# Altium PCB AirLP.PcbDoc
Units mm, origin at the board's own origin, x right, y up, seen from the top; angles counter-clockwise.
Board outline 81 x 61 mm, 2 copper layers (Top Layer, Bottom Layer), stack 1.597 mm thick; 142 components, 85 nets, 433 pads, 108 vias.
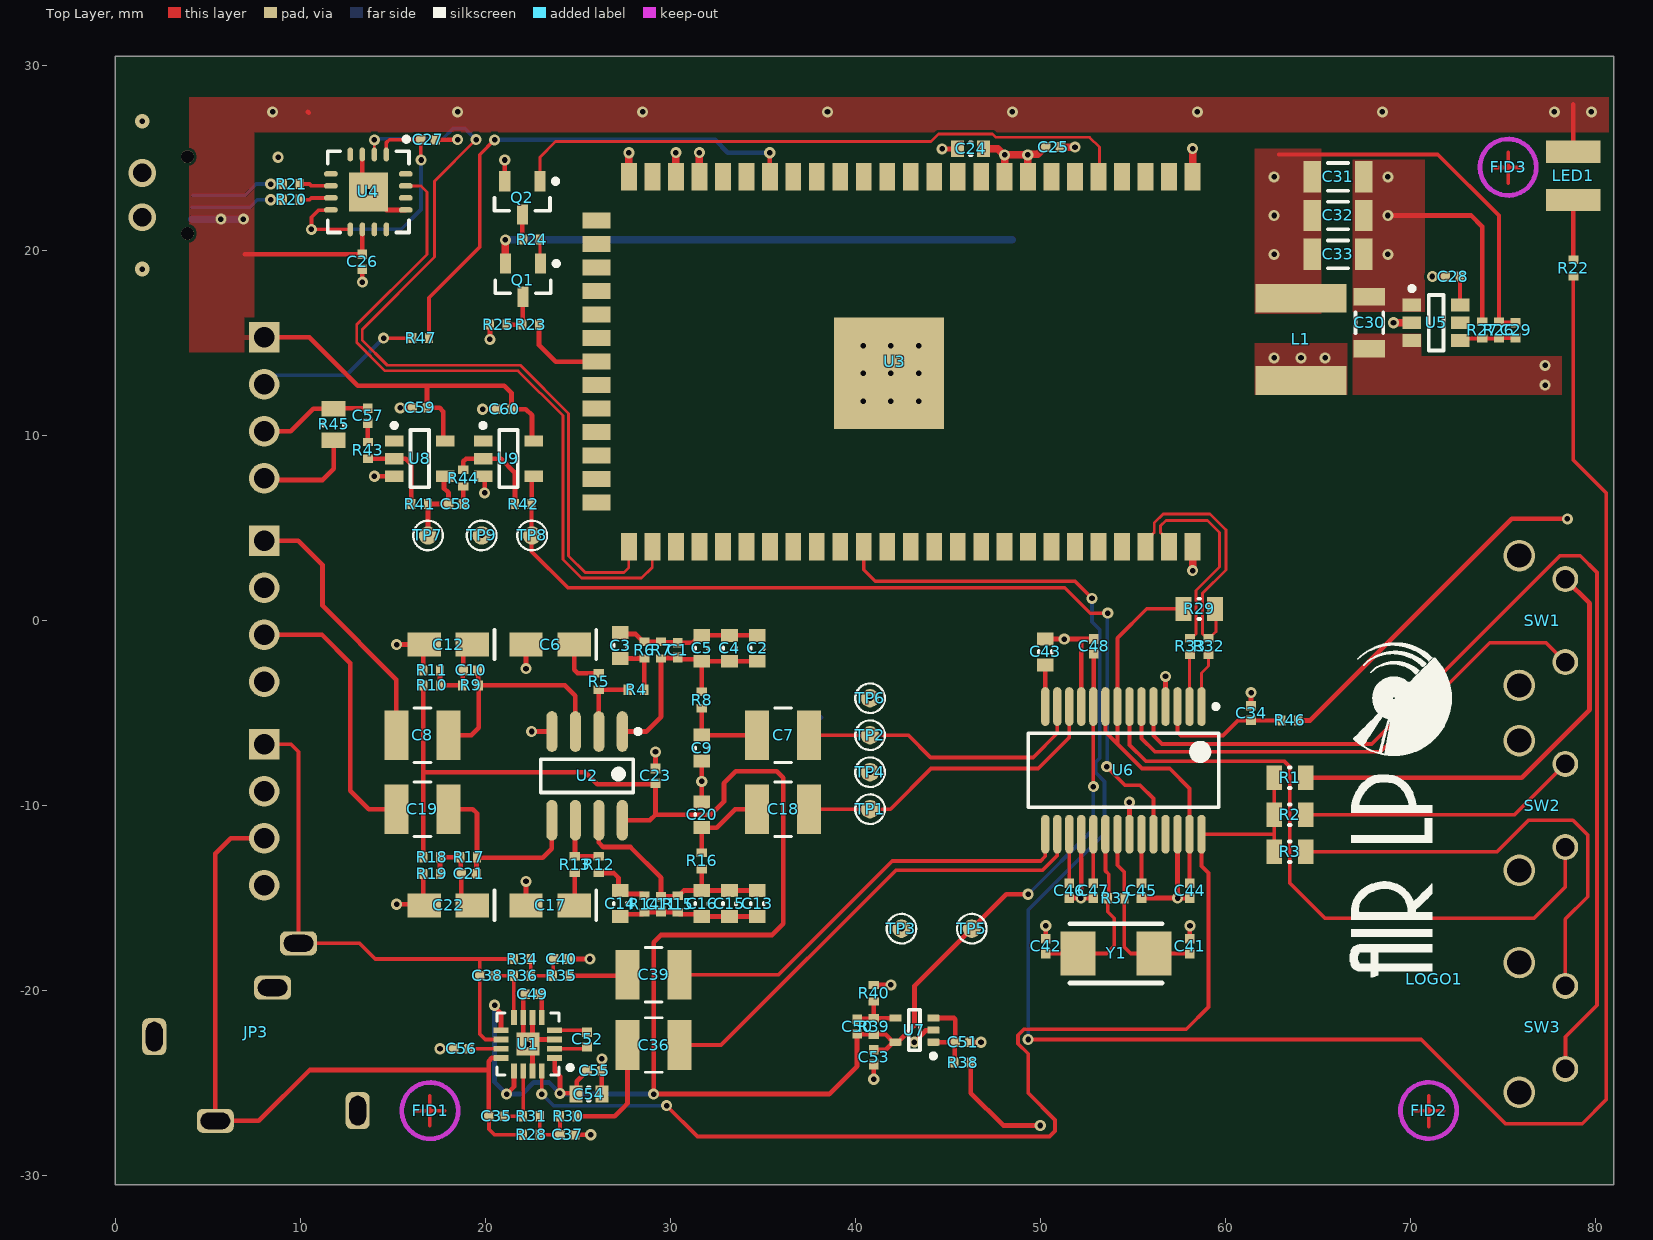
[diagram p0: Top Layer view]
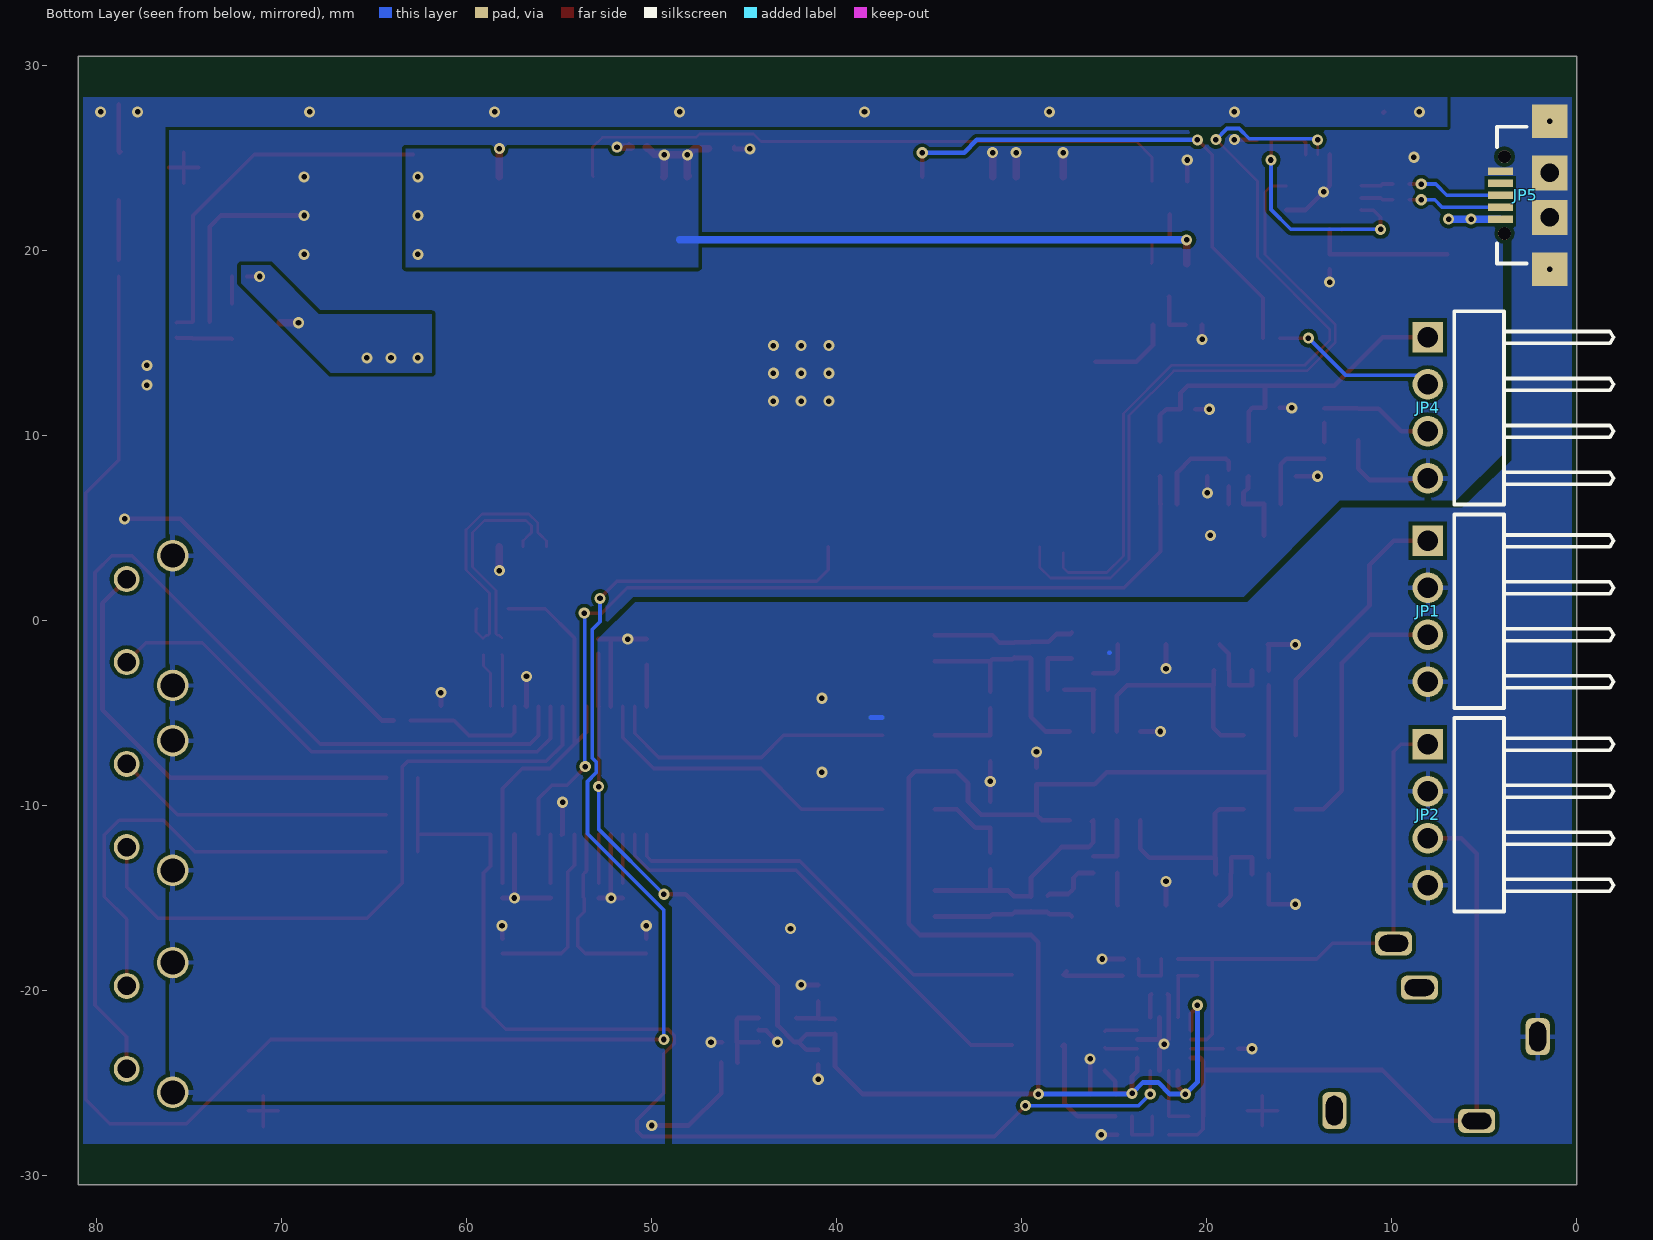
[diagram p1: Bottom Layer view, seen from below]
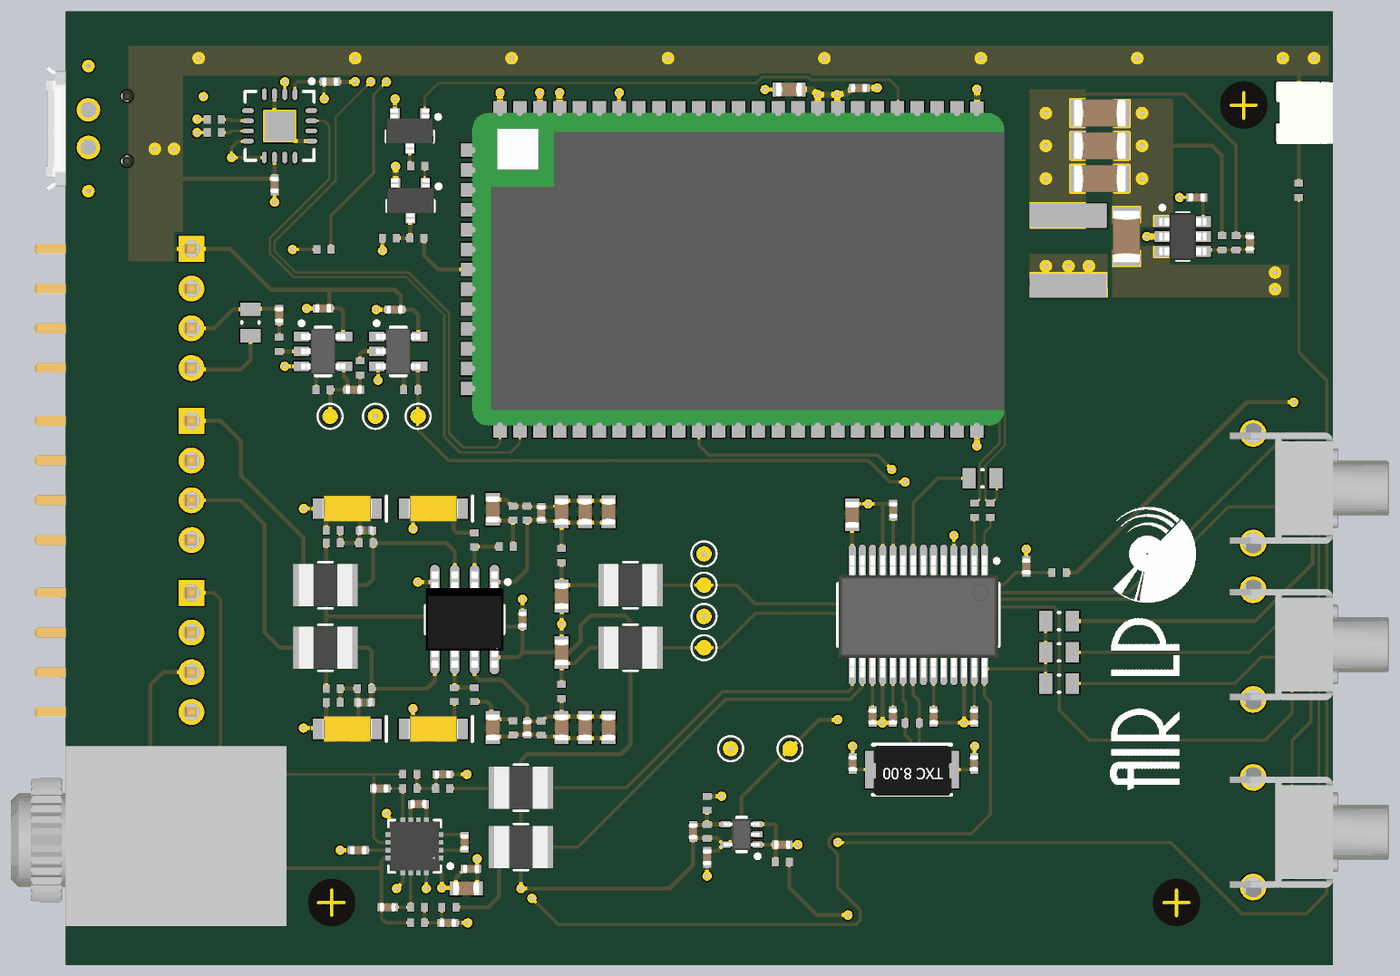
[diagram p2: 3D render of the assembled board from above, using the file's embedded part models]
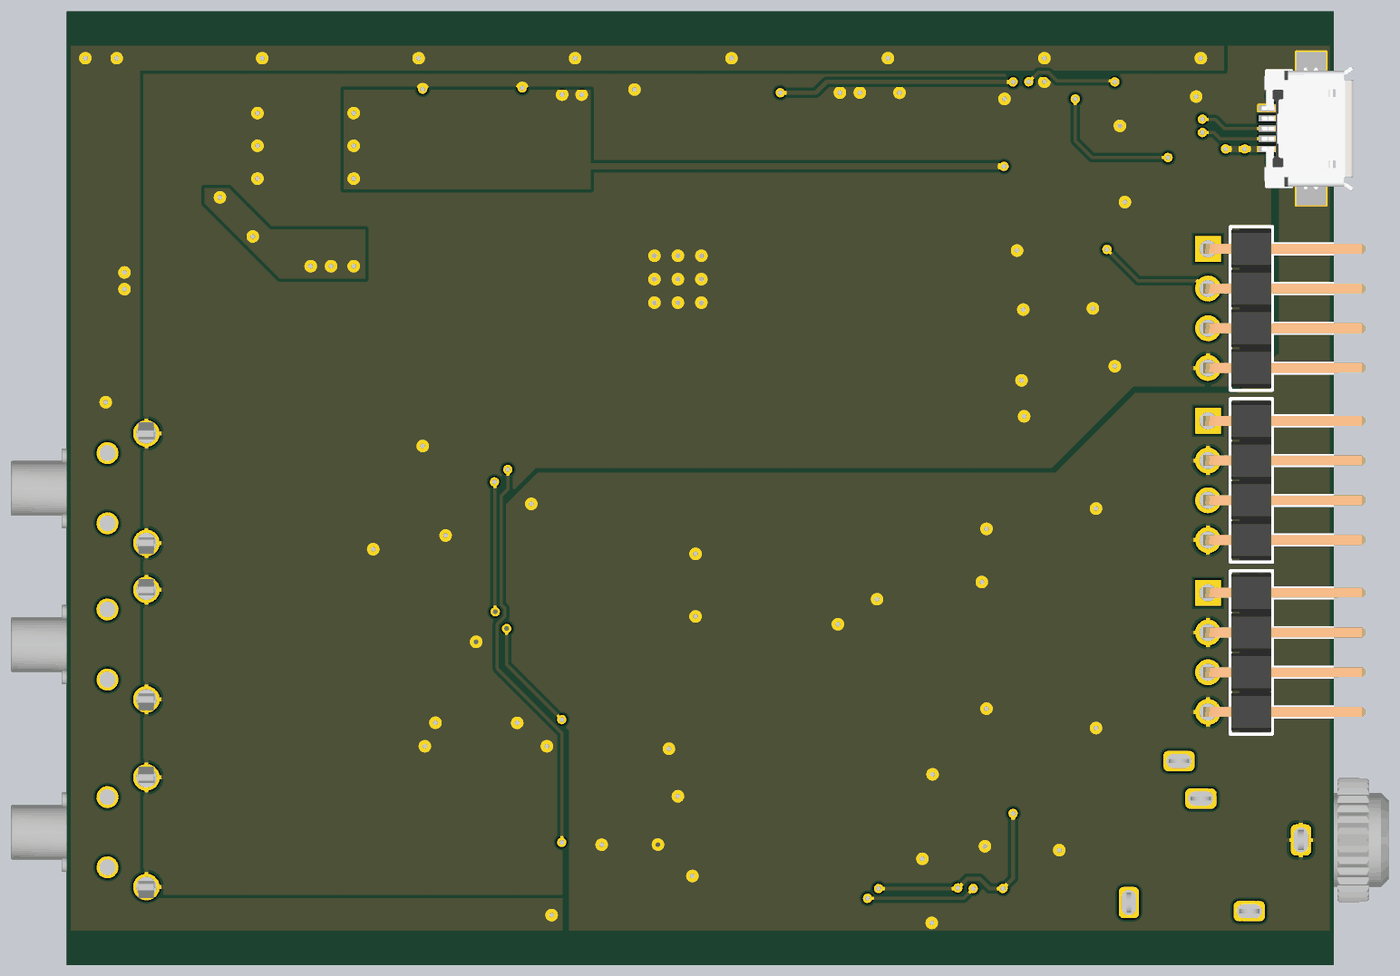
[diagram p3: 3D render of the assembled board from below, using the file's embedded part models]

## Layer stack, top to bottom
Top Solder: solder mask 0.0102, Solder Resist, Dk 3.5
Top Layer: signal copper 0.0356
Dielectric 1: dielectric 1.526, FR-4, Dk 4.8
Bottom Layer: signal copper 0.0356
Bottom Solder: solder mask 0.0102, Solder Resist, Dk 3.5

## Board outline
0,-30.5 81,-30.5 81,30.5 0,30.5

## Design rules (kind name [scope] priority, off if disabled: settings)
BoardOutlineClearance BoardOutlineClearance-BL [OnLayer('Bottom Layer')] p1: gap=0.254 ignorepadtopadclearanceinfootprint=FALSE except(0: Arc-SplitContinuation Track-SplitContinuation SMDPad-SplitContinuation THPad-SplitContinuation Via-SplitContinuation Fill-SplitContinuation Poly-SplitContinuation Region-SplitContinuation Text-SplitContinuation)
BoardOutlineClearance BoardOutlineClearance-TL [OnLayer('Top Layer')] p2: gap=0.254 ignorepadtopadclearanceinfootprint=FALSE except(0: Arc-SplitContinuation Track-SplitContinuation SMDPad-SplitContinuation THPad-SplitContinuation Via-SplitContinuation Fill-SplitContinuation Poly-SplitContinuation Region-SplitContinuation Text-SplitContinuation)
Clearance Clearance-BL [OnLayer('Bottom Layer')] p1: gap=0.2 ignorepadtopadclearanceinfootprint=FALSE
Clearance [All] p2: gap=0.15 ignorepadtopadclearanceinfootprint=FALSE
DiffPairsRouting DiffPairsRouting-D0 [InDifferentialPair('D0')] p1: maxlimit=0.205 minlimit=0.2 mostfreqgap=0.2 toplayer_minwidth=0.15 toplayer_maxwidth=0.15 toplayer_prefwidth=0.15 bottomlayer_minwidth=0.15 bottomlayer_maxwidth=0.15 bottomlayer_prefwidth=0.15 maxuncoupledlength=12.7
DiffPairsRouting DiffPairsRouting-D1 [InDifferentialPair('D1')] p2: maxlimit=0.205 minlimit=0.2 mostfreqgap=0.2 toplayer_minwidth=0.15 toplayer_maxwidth=0.15 toplayer_prefwidth=0.15 bottomlayer_minwidth=0.15 bottomlayer_maxwidth=0.15 bottomlayer_prefwidth=0.15 maxuncoupledlength=12.7
Height [All] p1: minheight=0 maxheight=10.15 prefheight=10
HoleSize [All] p1: absolutevalues=TRUE maxlimit=3 minlimit=0.3 maxpercent=80.000 minpercent=20.000
MinimumSolderMaskSliver [All] p1: minsoldermaskwidth=0
PolygonConnect [All] p1: thpad.connectstyle=Relief thpad.reliefconductorwidth=0.254 thpad.reliefentries=4 thpad.polygonreliefangle="90 Angle" thpad.airgapwidth=0.254 smdpad.connectstyle=Direct smdpad.reliefconductorwidth=0.254 smdpad.reliefentries=4 smdpad.polygonreliefangle="90 Angle" smdpad.airgapwidth=0.254 via.connectstyle=Direct via.reliefconductorwidth=0.254 via.reliefentries=4 via.polygonreliefangle="90 Angle" via.airgapwidth=0.254
RoutingVias [All] p1: holewidth=0.3 width=0.6 viastyle="Through Hole" minholewidth=0.3 minwidth=0.6 maxholewidth=0.5 maxwidth=1
SilkToSilkClearance [All] p1: silktosilkclearance=0.15
SilkToSolderMaskClearance [InPadClass('All Pads') And OnLayer('Top Layer')] p1: minsilkscreentomaskgap=0.15 clearancetoexposedcopper=TRUE
SolderMaskExpansion [All] p1: expansion=0.102
Width [All] p1: maxlimit=2 minlimit=0.15 preferedwidth=0.254
24 further rules are at their usual default settings.

## Classes and differential pairs
component class U_SPDIF-RX: C57 C58 C59 C60 R41 R42 R43 R44 R45 TP7 TP8 TP9 U8 U9
component class U_OM-02P: C24 C25 C26 C27 C28 C29 C30 C31 C32 C33 JP5 L1 LED1 Q1 Q2 R20 R21 R22 R23 R24 R25 R26 R27 R47 U3 U4 U5
component class U_USBDAC: C34 C35 C36 C37 C38 C39 C40 C41 C42 C43 C44 C45 C46 C47 C48 C49 C50 C51 C52 C53 C54 C55 C56 R28 R29 R30 R31 R32 R33 R34 R35 R36 R37 R38 R39 R40 R46 TP5 TP6 U1 U6 U7 Y1
component class U_RIAA: C1 C2 C3 C4 C5 C6 C7 C8 C9 C10 C11 C12 C13 C14 C15 C16 C17 C18 C19 C20 C21 C22 C23 R4 R5 R6 R7 R8 R9 R10 R11 R12 R13 R14 R15 R16 R17 R18 R19 U2
component class AirLP: FID1 FID2 FID3 JP1 JP2 JP3 JP4 LOGO1 R1 R2 R3 SW1 SW2 SW3 TP1 TP2 TP3 TP4
differential pair D1: +D1_P -D1_N

## Components (designator, comment, footprint, x,y, rotation, side; value= is the part's Value field where it differs from the comment)
C1 "0402CG101J500NT" CAPC0402(1005)33_L 30.4,-1.6 r270 top value=100pF
C2 "CL10C332JB8NFNC" CAPC0603(1608)55_L 34.7,-1.5 r270 top value=3.3nF
C3 "CL10C332JB8NFNC" CAPC0603(1608)55_L 27.3,-1.35 r90 top value=3.3nF
C4 "CL10C332JB8NFNC" CAPC0603(1608)55_L 33.2,-1.5 r270 top value=3.3nF
C5 "CL10C332JB8NFNC" CAPC0603(1608)55_L 31.7,-1.5 r270 top value=3.3nF
C6 "TAJA476K006RNJ" CAPPM3216X180N 23.5,-1.3 r180 top value=47uF
C7 "1uF" CAP_ECPU_G2 36.1,-6.2 r0 top
C8 "1uF" CAP_ECPU_G2 16.6,-6.2 r0 top
C9 "CL10C332JB8NFNC" CAPC0603(1608)55_L 31.7,-6.9 r90 top value=3.3nF
C10 "CC0402JRNPO9BN330" CAPC0402(1005)33_L 19.2,-2.7 r180 top value=33pF
C11 "0402CG101J500NT" CAPC0402(1005)33_L 29.5,-15.333 r90 top value=100pF
C12 "TAJA476K006RNJ" CAPPM3216X180N 18,-1.3 r180 top value=47uF
C13 "CL10C332JB8NFNC" CAPC0603(1608)55_L 34.7,-15.3 r90 top value=3.3nF
C14 "CL10C332JB8NFNC" CAPC0603(1608)55_L 27.3,-15.3 r270 top value=3.3nF
C15 "CL10C332JB8NFNC" CAPC0603(1608)55_L 33.2,-15.3 r90 top value=3.3nF
C16 "CL10C332JB8NFNC" CAPC0603(1608)55_L 31.7,-15.3 r90 top value=3.3nF
C17 "TAJA476K006RNJ" CAPPM3216X180N 23.5,-15.4 r180 top value=47uF
C18 "1uF" CAP_ECPU_G2 36.1,-10.2 r0 top
C19 "1uF" CAP_ECPU_G2 16.6,-10.2 r0 top
C20 "CL10C332JB8NFNC" CAPC0603(1608)55_L 31.7,-10.5 r270 top value=3.3nF
C21 "CC0402JRNPO9BN330" CAPC0402(1005)33_L 19.1,-13.7 r180 top value=33pF
C22 "TAJA476K006RNJ" CAPPM3216X180N 18,-15.4 r180 top value=47uF
C23 "GRM155R61C105KA12D" CAPC0402(1005)33_L 29.2,-8.4 r270 top value=1uF
C24 "CL10A106MQ8NNNC" CAPC0603(1608)55_L 46.24,25.5 r0 top value=10uF
C25 "GRM155R61C105KA12D" CAPC0402(1005)33_L 50.7,25.6 r180 top value=1uF
C26 "GRM155R61C104KA88D" CAPC0402(1005)33_L 13.35,19.4 r270 top value=100nF
C27 "GRM155R61C104KA88D" CAPC0402(1005)33_L 16.9,26 r0 top value=100nF
C28 "GRM155R61C104KA88D" CAPC0402(1005)33_L 72.3,18.6 r180 top value=100nF
C29 "GRM1555C1H680JA01D" CAPC0402(1005)33_L 75.7,15.7 r90 top value=68pF
C30 "CC1206KKX5R7BB226" CAPC1206(3216)75_L 67.8,16.1 r270 top value=22uF
C31 "CC1206KKX5R7BB226" CAPC1206(3216)75_L 66.1,23.99 r180 top value=22uF
C32 "CC1206KKX5R7BB226" CAPC1206(3216)75_L 66.1,21.9 r180 top value=22uF
C33 "CC1206KKX5R7BB226" CAPC1206(3216)75_L 66.1,19.8 r180 top value=22uF
C34 "GRM155R61C105KA12D" CAPC0402(1005)33_L 61.4,-5 r270 top value=1uF
C35 "0402CG101J500NT" CAPC0402(1005)33_L 20.585,-26.8 r180 top value=100pF
C36 "1uF" CAP_ECPU_G2 29.1,-22.952 r180 top
C37 "GRM1555C1H471JA01D" CAPC0402(1005)33_L 24.435,-27.8 r180 top value=470pF
C38 "0402CG101J500NT" CAPC0402(1005)33_L 20.1,-19.2 r180 top value=100pF
C39 "1uF" CAP_ECPU_G2 29.1,-19.152 r180 top
C40 "GRM1555C1H471JA01D" CAPC0402(1005)33_L 24.1,-18.3 r180 top value=470pF
C41 "CC0402JRNPO9BN330" CAPC0402(1005)33_L 58.075,-17.6 r270 top value=33pF
C42 "CC0402JRNPO9BN330" CAPC0402(1005)33_L 50.3,-17.6 r270 top value=33pF
C43 "CL10A106MQ8NNNC" CAPC0603(1608)55_L 50.275,-1.7 r270 top value=10uF
C44 "GRM155R61C105KA12D" CAPC0402(1005)33_L 58.075,-14.6 r90 top value=1uF
C45 "GRM155R61C105KA12D" CAPC0402(1005)33_L 55.475,-14.6 r90 top value=1uF
C46 "GRM155R61C105KA12D" CAPC0402(1005)33_L 51.575,-14.6 r90 top value=1uF
C47 "GRM155R61C105KA12D" CAPC0402(1005)33_L 52.875,-14.6 r90 top value=1uF
C48 "GRM155R61C105KA12D" CAPC0402(1005)33_L 52.9,-1.4 r270 top value=1uF
C49 "GRM155R61C105KA12D" CAPC0402(1005)33_L 22.55,-20.2 r0 top value=1uF
C50 "GRM1555C1H471JA01D" CAPC0402(1005)33_L 40.1,-21.95 r270 top value=470pF
C51 "GRM155R61C105KA12D" CAPC0402(1005)33_L 45.8,-22.8 r180 top value=1uF
C52 "GRM155R61C105KA12D" CAPC0402(1005)33_L 25.5,-22.65 r270 top value=1uF
C53 "GRM155R61C105KA12D" CAPC0402(1005)33_L 41,-23.6 r90 top value=1uF
C54 "CL10A106MQ8NNNC" CAPC0603(1608)55_L 25.6,-25.6 r180 top value=10uF
C55 "GRM155R61C104KA88D" CAPC0402(1005)33_L 25.9,-24.348 r180 top value=100nF
C56 "GRM155R61C104KA88D" CAPC0402(1005)33_L 18.7,-23.15 r180 top value=100nF
C57 "GRM155R71H472KA01D" CAPC0402(1005)33_L 13.65,11.076 r270 top value=4.7nF
C58 "GRM155R71H472KA01D" CAPC0402(1005)33_L 18.41,6.3 r0 top value=4.7nF
C59 "GRM155R61C104KA88D" CAPC0402(1005)33_L 16.45,11.5 r180 top value=100nF
C60 "GRM155R61C104KA88D" CAPC0402(1005)33_L 21.02,11.425 r180 top value=100nF
FID1 "Fiducial" MECH_FID_PLUS 17,-26.5 r0 top
FID2 "Fiducial" MECH_FID_PLUS 71,-26.5 r90 top
FID3 "Fiducial" MECH_FID_PLUS 75.3,24.5 r90 top
JP1 "61300411021" 61300411021 5.27,0.5 r90 bottom
JP2 "61300411021" 61300411021 5.27,-10.5 r90 bottom
JP3 "CONN_3.5" CONN-3.5_LUMBERG_1503_09 0,-22.5 r90 top
JP4 "61300411021" 61300411021 5.27,11.5 r90 bottom
JP5 "629105136821" 629105136821 1.45,23 r90 bottom
L1 "SWPA6045S4R7MT" L_6045 64.1,15.2 r90 top value=4.7uH
LED1 "BLUE" LED-KA-4040QBS-D 81,24 r90 top
LOGO1 "LOGO-AIRLP" LOGO-AIR-LP 71.3,-19.4 r90 top
Q1 "BC857B,215" NXP-SOT23_L 22.035,18.4 r270 top
Q2 "SI2302DS,215" NXP-SOT23_L 22,22.85 r270 top
R1 "1K5" RESC0805(2012)_L 63.5,-8.5 r180 top
R2 "1K5" RESC0805(2012)_L 63.5,-10.5 r180 top
R3 "1K5" RESC0805(2012)_L 63.5,-12.5 r180 top
R4 "976R" RESC0402(1005)_L 28.15,-3.738 r180 top
R5 "309R" RESC0402(1005)_L 26.135,-3.3 r270 top
R6 "22K6" RESC0402(1005)_L 28.6,-1.6 r90 top
R7 "280K" RESC0402(1005)_L 29.5,-1.6 r270 top
R8 "976R" RESC0402(1005)_L 31.7,-4.3 r270 top
R9 "48K7" RESC0402(1005)_L 19.2,-3.505 r180 top
R10 "22K6" RESC0402(1005)_L 17.1,-3.505 r0 top
R11 "22K6" RESC0402(1005)_L 17.1,-2.7 r180 top
R12 "976R" RESC0402(1005)_L 26.135,-13.2 r90 top
R13 "309R" RESC0402(1005)_L 24.835,-13.2 r90 top
R14 "22K6" RESC0402(1005)_L 28.6,-15.333 r270 top
R15 "280K" RESC0402(1005)_L 30.4,-15.338 r90 top
R16 "976R" RESC0402(1005)_L 31.7,-13 r90 top
R17 "48K7" RESC0402(1005)_L 19.1,-12.8 r180 top
R18 "22K6" RESC0402(1005)_L 17.1,-12.8 r0 top
R19 "22K6" RESC0402(1005)_L 17.1,-13.7 r180 top
R20 "27R" RESC0402(1005)_L 9.5,22.75 r0 top
R21 "27R" RESC0402(1005)_L 9.5,23.6 r0 top
R22 "120R" RESC0402(1005)_L 78.825,19.05 r90 top
R23 "49R9" RESC0402(1005)_L 22.45,16 r0 top
R24 "10K5" RESC0402(1005)_L 22.5,20.6 r0 top
R25 "10K5" RESC0402(1005)_L 20.698,16 r0 top
R26 "100K" RESC0402(1005)_L 74.8,15.7 r90 top
R27 "22K" RESC0402(1005)_L 73.9,15.7 r270 top
R28 "48K7" RESC0402(1005)_L 22.485,-27.8 r180 top
R29 "1K5" RESC0805(2012)_L 58.6,0.635 r180 top
R30 "39K2" RESC0402(1005)_L 24.485,-26.8 r180 top
R31 "22K6" RESC0402(1005)_L 22.485,-26.8 r180 top
R32 "27R" RESC0402(1005)_L 59.1,-1.4 r270 top
R33 "27R" RESC0402(1005)_L 58.1,-1.4 r270 top
R34 "48K7" RESC0402(1005)_L 22,-18.3 r180 top
R35 "39K2" RESC0402(1005)_L 24.1,-19.2 r180 top
R36 "22K6" RESC0402(1005)_L 22,-19.2 r180 top
R37 "1M" RESC0402(1005)_L 54.1,-15.01 r180 top
R38 "2R2" RESC0402(1005)_L 45.8,-23.9 r0 top
R39 "39K2" RESC0402(1005)_L 41,-21.95 r270 top
R40 "10K5" RESC0402(1005)_L 41,-20.15 r270 top
R41 "100K" RESC0402(1005)_L 16.45,6.3 r0 top
R42 "100K" RESC0402(1005)_L 22.05,6.3 r0 top
R43 "220R" RESC0402(1005)_L 13.65,9.2 r270 top
R44 "220R" RESC0402(1005)_L 18.81,7.7 r90 top
R45 "75R" RESC0805(2012)_L 11.8,10.6 r90 top
R46 "2R2" RESC0402(1005)_L 63.5,-5.4 r0 top
R47 "120R" RESC0402(1005)_L 16.5,15.27 r0 top
SW1 "SW_TACT_FSMRA2JH" SW_FSMRA2JH 81,0 r180 top
SW2 "SW_TACT_FSMRA2JH" SW_FSMRA2JH 81,-10 r180 top
SW3 "SW_TACT_FSMRA2JH" SW_FSMRA2JH 81,-22 r180 top
TP1 "MECH_Testpoint" MECH_TP_39_mil 40.8,-10.2 r0 top
TP2 "MECH_Testpoint" MECH_TP_39_mil 40.8,-6.2 r90 top
TP3 "MECH_Testpoint" MECH_TP_39_mil 42.5,-16.66 r180 top
TP4 "MECH_Testpoint" MECH_TP_39_mil 40.8,-8.2 r180 top
TP5 "MECH_Testpoint" MECH_TP_39_mil 46.3,-16.66 r90 top
TP6 "MECH_Testpoint" MECH_TP_39_mil 40.8,-4.2 r90 top
TP7 "MECH_Testpoint" MECH_TP_39_mil 16.9,4.6 r90 top
TP8 "MECH_Testpoint" MECH_TP_39_mil 22.525,4.6 r90 top
TP9 "MECH_Testpoint" MECH_TP_39_mil 19.8,4.6 r90 top
U1 "MAX97220AETE+" 21-0136I_T1633-4 22.3,-22.9 r180 top
U2 "IC-LINEAR-MAX4477ASA" SOIC8_N 25.5,-8.4 r270 top
U3 "OM-O2SP" CPU-OM-O2S 60,4 r90 top
U4 "FT230XQ" QFN-16_N 13.675,23.175 r270 top
U5 "TPS54302DDCR" FAIR-MA06A_V 71.4,16.1 r0 top
U6 "PCM2906C" SSOP28_N 54.5,-8.1 r270 top
U7 "AP2127K-ADJTRG1" DCK0005A_L 43.2,-22.14 r180 top
U8 "SN74LVC1GU04DBVR" DBV0005A_N 16.45,8.75 r0 top
U9 "SN74LVC1GU04DBVR" DBV0005A_N 21.25,8.75 r0 top
Y1 "ABM3-12.288MHZ-D2Y-T" XTAL_SMD_5.0x3.2 54.1,-18 r180 top value=12.288MHz

## Footprints (in the part's own frame and the unit in brackets; to place one, negate y for a bottom-side part, rotate by r counter-clockwise, add the part's x,y. Pads: shape width x height; smd on the part's side, far side on the other; paste and mask are expansions set on the pad)
21-0136I_T1633-4 [mil]
  rect 32x12 smd paste+0 mask+0: 1(-57,29.53) 2(-57,9.84) 3(-57,-9.84) 4(-57,-29.53) 9(57,-29.53) 10(57,-9.84) 11(57,9.84) 12(57,29.53)
  rect 12x32 smd paste+0 mask+0: 5(-29.53,-57) 6(-9.84,-57) 7(9.84,-57) 8(29.53,-57) 13(29.53,57) 14(9.84,57) 15(-9.84,57) 16(-29.53,57)
  rect 49x49 smd paste-24 mask+0: 17(0,0)
  silkscreen extent -95,-66 66,66, body extent -61,-61 61,61, height 32
61300411021 [mm] "Pin Header, pitch 2.54 mm, THT, Angled, single row, 4p"
  rect 1.65x1.65 hole 1.1: 1(3.81,2.77)
  round 1.65 hole 1.1: 2(1.27,2.77) 3(-1.27,2.77) 4(-3.81,2.77)
  silkscreen extent -5.23,-7.27 5.23,1.35, body extent -5.08,-7.27 5.08,3.09, height 2.58
629105136821 [mm] "Micro USB 2.0 SMT Type B Horizontal 5 Contacts"
  rect 0.4x1.35 smd: 1(-1.3,2.675) 2(-0.65,2.675) 3(0,2.675) 4(0.65,2.675) 5(1.3,2.675)
  round 0.7 hole 0.7 unplated: MH1(-2.075,2.45) MH2(2.075,2.45)
  rect 1.8x1.9 smd: Shell(-4,0) Shell(4,0)
  rect 1.9x1.9 smd: Shell(-1.2,0) Shell(1.2,0)
  silkscreen extent -3.7,1.25 3.7,2.85, body extent -4,-2.73 4,3.17, height 2.69
CAP_ECPU_G2 [mil]
  rect 51x106 smd paste+0 mask+0: 1(-55.5,0) 2(55.5,0)
  silkscreen extent -18,-58 18,58, body extent -67,-53 67,53, height 63
CAPC0402(1005)33_L [mm] "Chip Capacitor, Body 1.0x0.5mm, Height 0.33mm, IPC High Density"
  rect 0.52x0.52 smd mask+0.05: 1(-0.4,0) 2(0.4,0)
  body extent -0.52,-0.27 0.52,0.27, height 0.55
CAPC0603(1608)55_L [mm] "Chip Capacitor, Body 1.6x0.8mm, Height 0.55mm, IPC High Density"
  rect 0.7x0.9 smd: 1(-0.7,0) 2(0.7,0)
  silkscreen extent -0.05,-0.35 0.05,0.35, body extent -0.85,-0.45 0.85,0.45, height 0.9
CAPC1206(3216)75_L [mm] "Chip Capacitor, Body 3.2x1.6mm, Height 0.75mm, IPC High Density"
  rect 0.95x1.7 smd: 1(-1.4,0) 2(1.4,0)
  silkscreen extent -0.55,-0.75 0.55,0.75, body extent -1.68,-0.87 1.68,0.87, height 1
CAPPM3216X180N [mm]
  rect 1.8x1.3 smd: 1(-1.3,0) 2(1.3,0)
  silkscreen extent -2.5,-0.8 -2.5,0.8, body extent -1.6,-0.82 1.6,0.82, height 1.8
CONN-3.5_LUMBERG_1503_09 [mm] "3.5 mm"
  rrect50% 2x1.3 hole 0.9 slot 1.6 at 0 deg: 1(0,-2.1) 4(-4,-13.1)
  rrect50% 1.3x2 hole 0.9 slot 1.6 at 90 deg: 2(-4.55,-5.4) 3(5.05,-9.9) 5(2.65,-8.5)
  body extent -5.5,-14.1 6,3.5, height 7.01
CPU-OM-O2S [mm] "LINUX MODULE"
  rect 6.041x5.959 smd mask+0.102: 0(9.369,18.174)
  rect 1.5x0.86 smd mask+0.102: 1(19.99,1.76) 2(20,3.03) 3(20,4.3) 4(20,5.57) 5(20,6.84) 6(20,8.11) 7(20,9.38) 8(20,10.65) 9(20,11.92) 10(20,13.19) 11(20,14.46) 12(20,15.73) 13(20,17) 14(20,18.27) 15(20,19.54) 16(20,20.81) 17(20,22.08) 18(20,23.35) 19(20,24.62) 20(20,25.89) 21(20,27.16) 22(20,28.43) 23(20,29.7) 24(20,30.97) 25(20,32.24) 39(-0.01,32.24) 40(-0.01,30.97) 41(-0.01,29.7) 42(-0.01,28.43) 43(-0.01,27.16) 44(-0.01,25.89) 45(-0.01,24.62) 46(-0.01,23.35) 47(-0.01,22.08) 48(-0.01,20.81) 49(-0.01,19.54) 50(-0.01,18.27) 51(-0.01,17) 52(-0.01,15.73) 53(-0.01,14.46) 54(-0.01,13.19) 55(-0.01,11.92) 56(-0.01,10.65) 57(-0.01,9.38) 58(-0.01,8.11) 59(-0.01,6.84) 60(-0.01,5.57) 61(-0.01,4.3) 62(-0.01,3.03) 63(-0.01,1.76)
  rect 0.86x1.5 smd mask+0.102: 26(17.62,33.99) 27(16.35,33.99) 28(15.08,33.99) 29(13.81,33.99) 30(12.54,33.99) 31(11.27,33.99) 32(10,33.99) 33(8.73,33.99) 34(7.46,33.99) 35(6.19,33.99) 36(4.92,33.99) 37(3.65,33.99) 38(2.38,33.99)
  body extent 0,0 20,34, height 2.71
DBV0005A_N [mm] "SOT23, 5-Leads, Body 3.05x1.75mm, Pitch 0.95mm, IPC Medium Density"
  rect 1x0.6 smd: 1(-1.375,0.95) 2(-1.375,0) 3(-1.375,-0.95) 4(1.375,-0.95) 5(1.375,0.95)
  silkscreen extent -1.5,-1.55 0.5,1.92, body extent -1.42,-1.46 1.42,1.46, height 1.08
DCK0005A_L [mm] "SOT23, 5-Leads, Body 2.15x1.4mm, Pitch 0.65mm, IPC High Density"
  rrect25% 0.65x0.4 smd: 1(-1.025,0.65) 2(-1.025,0) 3(-1.025,-0.65) 4(1.025,-0.65) 5(1.025,0.65)
  silkscreen extent -1.15,-1.1 0.3,1.52, body extent -1.14,-1 1.14,1, height 0.94
FAIR-MA06A_V [mm] "SOT23, 6-Leads, Body 3x1.7mm, Pitch 0.95mm"
  rect 1x0.7 smd: 1(-1.3,0.95) 2(-1.3,0) 3(-1.3,-0.95) 4(1.3,-0.95) 5(1.3,0) 6(1.3,0.95)
  silkscreen extent -1.42,-1.5 0.4,1.97, body extent -1.5,-1.5 1.5,1.5, height 1.1
L_6045 [mm]
  rect 1.55x4.9 smd: 1(-2.225,0) 2(2.225,0)
  body extent -3,-2.5 3,2.5, height 4.5
LED-KA-4040QBS-D [mm]
  rect 1.2x2.95 smd: A(1.35,2.175) K(-1.27,2.175)
  body extent -2,0 2,3.6, height 4.16
LOGO-AIR-LP [mm]
  silkscreen extent 0.1,-0.94 18.19,4.55
MECH_FID_PLUS [mil] "FIDUCIAL 1.2MM ROUND"
  round 120 on Top Solder: 0(0.35,-0.03)
  Top Layer lines w8: -33.43,-0.03 31.53,-0.03 ; 0.04,-31.53 0.04,31.46
  Top Layer keep-out circle w10: c0.35,-0.04 r60
  body extent -52,-52 52,52, height 8
MECH_TP_39_mil [mil]
  round 39 smd paste-78.74: 1(0,0)
  silkscreen extent -31,-31 32,31
NXP-SOT23_L [mm] "SOT23, 3-Leads, Body 3x1.4mm, Pitch 0.95mm, IPC High Density"
  rect 1.1x0.6 smd: 1(-0.9,0.95) 2(-0.9,-0.95) 3(0.9,0)
  silkscreen extent -1.02,-1.5 0.7,1.93, body extent -1.42,-1.5 1.42,1.5, height 1.2
QFN-16_N [mm] "QFN, 16-Leads, Body 4x4mm, Pitch 0.65mm, Thermal Pad 2.1x2.1mm, IPC Medium Density"
  oval 0.75x0.3 smd: 1(-2.025,0.975) 2(-2.025,0.325) 3(-2.025,-0.325) 4(-2.025,-0.975) 9(2.025,-0.975) 10(2.025,-0.325) 11(2.025,0.325) 12(2.025,0.975)
  oval 0.3x0.75 smd: 5(-0.975,-2.025) 6(-0.325,-2.025) 7(0.325,-2.025) 8(0.975,-2.025) 13(0.975,2.025) 14(0.325,2.025) 15(-0.325,2.025) 16(-0.975,2.025)
  rect 2.1x2.1 smd paste-1.05: 17(0,0)
  silkscreen extent -2.97,-2.2 2.2,2.2, body extent -2.05,-2.05 2.05,2.05, height 0.8
RESC0402(1005)_L [mm] "Chip Resistor, Body 1.0x0.5mm, IPC High Density"
  rect 0.45x0.55 smd mask+0.05: 1(-0.45,0) 2(0.45,0)
  body extent -0.52,-0.27 0.53,0.28, height 0.4
RESC0805(2012)_L [mm] "Chip Resistor, Body 2.0x1.3mm, IPC High Density"
  rect 0.85x1.3 smd: 1(-0.85,0) 2(0.85,0)
  silkscreen extent -0.05,-0.55 0.05,0.55, body extent -1.1,-0.67 1.1,0.68, height 0.7
SOIC8_N [mm] "SOIC, 8-Leads, Body 4.9x3.9mm, Pitch 1.27mm, IPC Medium Density"
  oval 2.2x0.6 smd: 1(-2.4,1.905) 2(-2.4,0.635) 3(-2.4,-0.635) 4(-2.4,-1.905) 5(2.4,-1.905) 6(2.4,-0.635) 7(2.4,0.635) 8(2.4,1.905)
  silkscreen extent -2.52,-2.5 0.9,2.88, body extent -3.08,-2.5 3.08,2.5, height 2
SSOP28_N [mm] "SOP, 28-Leads, Body 10.2x5.3mm, Pitch 0.65mm, IPC Medium Density"
  oval 2.1x0.45 smd mask+0.05: 1(-3.45,4.225) 2(-3.45,3.575) 3(-3.45,2.925) 4(-3.45,2.275) 5(-3.45,1.625) 6(-3.45,0.975) 7(-3.45,0.325) 8(-3.45,-0.325) 9(-3.45,-0.975) 10(-3.45,-1.625) 11(-3.45,-2.275) 12(-3.45,-2.925) 13(-3.45,-3.575) 14(-3.45,-4.225) 15(3.45,-4.225) 16(3.45,-3.575) 17(3.45,-2.925) 18(3.45,-2.275) 19(3.45,-1.625) 20(3.45,-0.975) 21(3.45,-0.325) 22(3.45,0.325) 23(3.45,0.975) 24(3.45,1.625) 25(3.45,2.275) 26(3.45,2.925) 27(3.45,3.575) 28(3.45,4.225)
  silkscreen extent -3.57,-5.15 2,5.15, body extent -3.8,-5.1 4,5.1, height 1.9
SW_FSMRA2JH [mm] "Switch; 2 Leads"
  round 1.4 hole 1: 1(2.61,2.245) 2(2.61,-2.245)
  round 1.7 hole 1.3: 3(5.1,3.505) 4(5.1,-3.505)
  body extent -3.56,-4.2 6.59,4.2, height 7.02
XTAL_SMD_5.0x3.2 [mm]
  rect 1.9x2.4 smd: 1(-2.05,0) 2(2.05,0)
  silkscreen extent -2.5,-1.6 2.5,1.6, body extent -2.54,-1.52 2.46,1.68, height 1.2

## Part data
C1 C11 C35 C38: library part CAP_100pF_0402, "0402 100pF ±5% 50V C0G,NP0", Dielectric=C0G, Voltage=50V, MPN=0402CG101J500NT, PackageReference=0402
C2 C3 C4 C5 C9 C13 C14 C15 C16 C20: library part CAP_3.3nF_0603, "0603 3.3nF ±5% 50V C0G(NPO) H=0.8mm", Dielectric=C0G, Voltage=50V, MPN=CL10C332JB8NFNC, PackageReference=0603
C6 C12 C17 C22: library part CAP_47uF_6.3V_1206, "47µF ±10% 6.3V ESR=1.6O@100kHz", Dielectric=Tantalum, Voltage=6.3V, MPN=TAJA476K006RNJ, PackageReference=1206
C7 C8 C18 C19 C36 C39: library part CAP-ECP-U1C105MA5, "1µF Film Capacitor  16V Acrylic, Metallized - Stacked 1210 (3225 Metric)", MPN=ECP-U1C105MA5, Built_By=EMA_UL_Team, C="Copyright (C) 2015 Accelerated Designs. All rights reserved", RefDes=RefDes, Type=DEV, Vendor=Panasonic
C10 C21 C41 C42: library part CAP_33pF_0402, "0402 33PF ±5% 50V NPO", Dielectric=C0G, Voltage=50V, MPN=CC0402JRNPO9BN330, PackageReference=0402
C23 C25 C34 C44 C45 C46 C47 C48 C49 C51 C52 C53: library part CAP_1uF_0402, "0402 1µF ±10% 16V X5R", Dielectric=X5R, Voltage=10V, MPN=GRM155R61C105KA12D, PackageReference=0402
C24 C43 C54: library part CAP_10uF_0603, "0603 10uF ±20% 6.3V X5R H=0.8mm", Dielectric=X5R, Voltage=10V, MPN=CL10A106MQ8NNNC, PackageReference=0603
C26 C27 C28 C55 C56 C59 C60: library part CAP_100nF_0402, "0402 100nF ±10% 16V X5R", Dielectric=X5R, Voltage=16V, MPN=GRM155R61C104KA88D, PackageReference=0402
C29: library part CAP_68pF_0402, "0402 68pF ±5% 50V C0G", Dielectric=C0G, Voltage=50V, MPN=GRM1555C1H680JA01D, PackageReference=0402
C30 C31 C32 C33: library part CAP_22uF_16V_1206, "1206 22uF ±10% 16V X5R", Dielectric=X5R, Voltage=16V, MPN=CC1206KKX5R7BB226, PackageReference=1206
C37 C40 C50: library part CAP_470pF_0402, "0402 470pF ±5% 50V C0G", Dielectric=C0G, Voltage=50V, MPN=GRM1555C1H471JA01D, PackageReference=0402
C57 C58: library part CAP_4.7nF_0402, "0402 4.7nF ±10% 50V X7R", Dielectric=X7R, Voltage=50V, MPN=GRM155R71H472KA01D, PackageReference=0402
FID1 FID2 FID3: library part MECH_FIDUCIAL_PLUS
JP1 JP2 JP4: "THT Angled Pin Header WR-PHD, Pitch 2.54 mm, Single Row, 4 pins", Contact Resistance="20 mOhm", Operating Temperature="-40 to 105 degC", Rated Current="3 A", Withstanding Voltage="500 VAC", Working Voltage="250 VAC", ComponentLink1Description=Manufacturer, ComponentLink1URL=http://www.we-online.de, ComponentLink2Description=Datasheet, ComponentLink2URL=https://katalog.we-online.de/em/datasheet/6130xx11021.pdf, Gender=Male, Mounting Technology=THT, Orientation=Angled, Packaging=Bag, Part Number=61300411021, Pin Number=4, Pitch="2.54 mm", Published Date="August 2018", Publisher="Wurth Elektronik", Row Number=Single
JP3: library part CONN_3.5_1503_09, "Jack Socket, 3.5mm, Thru-Hole, Horizontal, 3-Conductor with Tip open & Ring closed", MPN="1503 09", ELFA=300-68-357, Farnell=1243244
JP5: "Micro USB 2.0 Type B Receptacle WR-COM, Horizontal, SMT, with Pads and Pegs", Contact Resistance="30 mOhm", Operating Temperature="-40 to 105 degC", Rated Current="1 A", Working Voltage="30 VAC", ComponentLink1Description=Manufacturer, ComponentLink1URL=http://www.we-online.de, ComponentLink2Description=Datasheet, ComponentLink2URL=https://katalog.we-online.de/em/datasheet/629105136821.pdf, Connector Type="Micro USB 2.0 Type B", Gender=Receptacle, Mounting Technology=SMT, Orientation=Horizontal, Packaging="Tape and Reel", Part Number=629105136821, Published Date="September 2018", Publisher="Wurth Elektronik"
L1: library part L_4.7uH_6045, "6.0*6.0*4.5 4.7µH ±20% 5.50A DCR=0.034 SRF=24MHz", MPN=SWPA6045S4R7MT
LED1: library part LED-BLUE-KA-4040QBS-D, "LED 0805", MPN=KA-4040QBS-D, Farnell=2079906, VF=3.3V
LOGO1: "LOGO AIR LP"
Q1: library part BC857, "PNP,Vce=45V,Ic=0.1A,hfe=220~475", Manufacturer=Infineon, ComponentLink1Description="Manufacturer URL", ComponentLink1URL=http://www.infineon.com/, ComponentLink2Description=Datasheet, ComponentLink2URL=http://www.infineon.com/dgdl/bc857series_bc858series_bc859series_bc860series.pdf?folderId=db3a304314dca389011541d30fa21656&fileId=db3a304314dca389011541da0e3a1661, ComponentLink3Description="Package Specification", ComponentLink3URL=http://www.infineon.com/dgdl/SOT23-Package_Overview.pdf?folderId=db3a30431936bc4b0119532290053c66&fileId=db3a30431936bc4b0119533468123c85, fT (typ)="250 MHz", Green=TRUE, IBM (max)="200 mA", IC (max)="100 mA", ICBO (max)="15 nA", ICM (max)="200 mA", Mounting Technology="Surface Mount", MPN=BC857B,215, PackageDescription="3-Pin Small Outline Transistor Package, 1.3 x 2.9 mm Body, 0.95 mm Pitch", PackageReference=SOT23, PackageVersion=Apr-08, Packing=Reel, Polarity=PNP, Ptot (max)="330 mW", VCBO (max)="50 V", VCEO (max)="45 V", VEBO (max)="5 V"
Q2: library part SI2302, "N-Channel Enhancement Mode Field-Effect Transistor, 20 V, 2.5 A, 3-Pin SOT23, Tape and Reel", Manufacturer="NXP Semiconductors", MPN=SI2302CDS-T1-GE3, Channel Type=N, Ciss [typ] (pF)=230, Code_JEDEC=TO-236AB, ComponentLink1Description="Manufacturer URL", ComponentLink1URL=http://www.nxp.com/, ComponentLink2Description=Datasheet, ComponentLink2URL=http://www.nxp.com/documents/data_sheet/SI2302DS.pdf, ComponentLink3Description="Package Specification", ComponentLink3URL=http://www.nxp.com/documents/outline_drawing/sot023_po.pdf, Coss [typ] (pF)=125, DatasheetVersion="Rev. 02", ID [max] (A)=2.5, Mounting Technology="Surface Mount", PackageDescription="3-Pin Small Outline Transistor Package, Body 2.9 x 1.3 mm, Pitch 0.95 mm", PackageReference=SOT23, PackageVersion="06-03-16, 03/2006", Packing="Tape & Reel", VDS [max] (V)=20
R1 R2 R3 R29: library part RES_1K5_0805, "0805 1.5KO ±5% 1/8W", MPN=RC0805JR-071K5L, Power=125mW, Tolerance=5%
R4 R8 R12 R16: library part RES_976R_0402, "0402 976O ±1% 1/16W", MPN=0402WGF9760TCE, Power=62.5mW, Tolerance=1%
R5 R13: library part RES_309R_0402, "0402 309O ±1% 1/16W", MPN=0402WGF3090TCE, Power=62.5mW, Tolerance=1%
R6 R10 R11 R14 R18 R19 R31 R36: library part RES_22K6_0402, "0402 22.6KO ±1% 1/16W", MPN=RC0402FR-0722K6L, Power=62.5mW, Tolerance=1%
R7 R15: library part RES_280K_0402, "0402 280KO ±1% 1/16W", MPN=0402WGF2803TCE, Power=62.5mW, Tolerance=1%
R9 R17 R28 R34: library part RES_48K7_0402, "0402 48.7KO ±1% 1/16W", MPN=0402WGF4872TCE, Power=62.5mW, Tolerance=1%
R20 R21 R32 R33: library part RES_27R_0402, "0402 27O ±1% 1/16W", MPN=RC0402FR-0727RL, Power=62.5mW, Tolerance=1%
R22 R47: library part RES_120R_0402, "0402 120O ±1% 1/16W", MPN=RC0402FR-07120RL, Power=62.5mW, Tolerance=1%
R23: library part RES_49R9_0402, "0402 49.9O ±1% 1/16W", MPN=RC0402FR-0749R9L, Power=62.5mW, Tolerance=1%
R24 R25 R40: library part RES_10K5_0402, "0402 10.5KO ±1% 1/16W", MPN=RC0402FR-0710K5L, Power=62.5mW, Tolerance=1%
R26 R41 R42: library part RES_100K_0402, "0402 100KO ±1% 1/16W", MPN=RC0402FR-07100KL, Power=62.5mW, Tolerance=1%
R27: library part RES_22K_0402, "0402 22KO ±1% 1/16W", MPN=RC0402FR-0722KL, Power=62.5mW, Tolerance=1%
R30 R35 R39: library part RES_39K2_0402, "0402 39.2KO ±1% 1/16W", MPN=RC0402FR-0739K2L, Power=62.5mW, Tolerance=1%
R37: library part RES_1M_0402, "0402 1MO ±1% 1/16W", MPN=RC0402FR-071ML, Power=62.5mW, Tolerance=1%
R38 R46: library part RES_2R2_0402, "0402 2.2O ±1% 1/16W", MPN=0402WGF220KTCE, Power=62.5mW, Tolerance=1%
R43 R44: library part RES_220R_0402, "0402 220O ±1% 1/16W", MPN=RC0402FR-07220RL, Power=62.5mW, Tolerance=1%
R45: library part RES_75R_0805, "0805 75O ±1% 1/8W", MPN=RC0805FR-0775RL, Power=62.5mW, Tolerance=1%
SW1 SW2 SW3: "SWITCH TACTILE SPST-NO 0.05A 12V", MPN=FSMRA2JH, DigiKey=450-1662-ND, ELFA=35-665-57, Farnell=1555987
TP1 TP2 TP3 TP4 TP5 TP6 TP7 TP8 TP9: "Testpoint"
U1: "Differential Input DirectDrive Line Drivers/Headphone Amplifiers", DigiKey=MAX97220AETE+TCT-ND, Farnell=2516953, MPN=MAX97220AETE+
U2: "Dual Rail-to-Rail output  Low-Power Operational Amplifier", MPN=MAX4477ASA+, Farnell=1550527
U3: library part CPU-OM-O2SP, "Onion Omega2S", Mouser=353-OM-O2SP, MPN=OM-O2SP
U4: library part IC-COM-USB-FT230XQ-SQ17, "USB Bridge, USB to UART USB 2.0 UART Interface 16-QFN (4x4)", MPN=FT230XQ-R
U5: "Buck Switching Regulator IC Positive Adjustable 0.596V 1 Output 3A SOT-23-6 Thin, TSOT-23-6", MPN=TPS54302DDCR
U6: library part IC-AUDIO-PCM2906C, "IC STEREO AUD CODEC W/USB 28SSOP", MPN=PCM2906CDB
U7: "300mA HIGH SPEED, EXTREMELY LOW NOISE CMOS LDO REGULATOR", Manufacturer="Diodes Inc", Accuracy(%)=2, Code_JEDEC=MO-203, ComponentLink1Description="Manufacturer URL", ComponentLink1URL=http://www.ti.com/, ComponentLink2Description=Datasheet, ComponentLink2URL=http://www.ti.com/general/docs/lit/getliterature.tsp?genericPartNumber=TPS71701&fileType=pdf, ComponentLink3Description="Package Specification", ComponentLink3URL=http://www.ti.com/litv/pdf/mpds025f, Eco-Plan="Green (RoHS & no Sb/Br)", Iout(Max)(A)=0.3, Iq(Typ)(mA)=0.06, Mounting Technology="Surface Mount", MPN=AP2127K-ADJTRG1, PackageDescription="5-Pin Plastic Small-Outline, Body 2 x 1.25 mm, Pitch 0.65 mm", PackageReference=DCK0005A, PackageVersion=4093553-3/G, SubFamily="Single Channel LDO", Vdo(Typ)(mV)=170, Vin(Max)(V)=5.5, Vin(Min)(V)=2.5, Vout Adj(Max)(V)=5.0, Vout Adj(Min)(V)=0.8
U8 U9: library part CMP-0859-00178-1, "Single Inverter Gate, DBV0005A, LARGE T&R", F @ Nom Voltage(Max)(Mhz)=150, ICC @ Nom Voltage(Max)(mA)=0.01, Operating Temperature Range(C)="-40 to 125,-40 to 85", Part Number=SN74LVC1GU04, Rating=Catalog, tpd @ Nom Voltage(Max)(ns)=5.5,4.5,4.2,3.5, Voltage(Nom)(V)=1.8,2.5,3.3,5, 3-State Output=No, Bits(#)=1, ComponentLink1Description="Manufacturer URL", ComponentLink1URL=http://www.ti.com/, ComponentLink2Description=Datasheet, ComponentLink2URL=http://www.ti.com/lit/ds/symlink/sn74lvc1gu04.pdf, DatasheetVersion=SCES215V, Input Type=CMOS/TTL, Logic=Inverting, MPN=SN74LVC1GU04DBVR, Output Drive (IOL/IOH)(Max)(mA)=32/-32, Output Type=CMOS, PackageReference=DBV0005A, PartId=1, PartNumber=SN74LVC1GU04DBVR, Schmitt Trigger=No, Sub-Family="Inverting Buffer/Driver", Technology Family=LVC, VCC(Max)(V)=5.5, VCC(Min)(V)=1.65
Y1: library part XTAL_12.288MHz_ABM3-12.288MHZ-D2Y-T, "CRYSTAL 12.288MHZ 18PF SMD", DigiKey=535-10635-1-ND, Farnell=1368769, MPN=ABM3-12.288MHZ-D2Y-T

## Via types
v1: diameter 0.6, hole 0.3, Top Layer to Bottom Layer, 104 vias
v2: diameter 0.8, hole 0.3, Top Layer to Bottom Layer, 2 vias
v3: diameter 1.5, hole 1, Top Layer to Bottom Layer, 2 vias

## Nets (pads, with @x,y where several pads share a name; then routed paths per layer and width w, separated by ;. In a path a pad name is that pad's centre, name@x,y a point inside that pad or via, vN(x,y) a via of type N, cw(c..) or ccw(c..) an arc to the next point about the centre after c; other vN are vias at no path point)
3V3: C24.2 C25.2 C29.2 C31.2 C32.2 C33.2 L1.2 Q1.2 R26.2 U3.8 U3.9 | length 54.8
  Top Layer w0.2: 62.9,25.2 71.5,25.2 74.8,21.9 R26.2 74.825,16.125 75.675,16.125 C29.2
  Top Layer w0.4: Q1.2 v1(21.085,20.585) v1@21.1,20.6 ; C24.2@46.92,25.52 C24.2 47.701,25.5 48.026,25.175 v1(48.08,25.175) ; U3.9 48.038,24.042 48.08,24.083 v1(48.08,25.175) ; U3.8 49.325,24.025 v1(49.325,25.175) ; C25.2 50.28,25.62 50.28,25.58 50.24,25.54 50.2,25.54 49.873,25.213 49.363,25.213 v1(49.325,25.175) ; v1(48.08,25.175) v1(49.325,25.175)
  Bottom Layer w0.4: v1(21.085,20.585) 48.5,20.585
  other v1: 62.65,19.8 62.65,21.9 62.65,23.99
ADJ: C50.1 R39.1 R40.2 U7.4 | length 3
  Top Layer w0.254: C50.1 40.125,-21.525 40.975,-21.525 R39.1 R39.1@41.005,-21.495 ; R40.2 41,-21.49 R39.1@41.005,-21.495 ; U7.4 42.17,-21.495 R39.1@41.005,-21.495
AI-: C35.1 R31.2 U1.14 | length 3.5
  Top Layer w0.2: C35.1 R31.2 22.043,-26.792 22.043,-24.355 U1.14
AIN0L: C18.2 TP1.1 U6.12 | length 17.3
  Top Layer w0.2: C18.2 TP1.1 41.9,-10.2 44.1,-8 49.9,-8 51.575,-6.325 U6.12
AIN0R: C7.2 TP2.1 U6.13 | length 15.9
  Top Layer w0.2: C7.2 TP2.1 42.875,-6.2 44.075,-7.4 49.62,-7.4 50.925,-6.095 U6.13
BI-: C38.1 R36.2 U1.8 | length 3.3
  Top Layer w0.2: C38.1 R36.2 21.54,-19.21 21.54,-21.442 U1.8
CPU_RST: Q2.1 U3.5 | length 34
  Top Layer w0.15: Q2.1 22.95,25.05 23.801,25.901 44.101,25.901 44.5,26.3 47.425,26.3 47.6,26.125 52.675,26.125 53.2,25.6 53.2,24.04 U3.5
D1_N: R33.1 U3.62 | length 11.3
  Top Layer w0.15: U3.62 56.97,4.31 56.615,4.665 56.598,4.665 56.51,4.753 56.51,5.124 56.798,5.412 59.041,5.412 59.693,4.76 59.693,2.888 58.425,1.62 58.425,-0.712 58.337,-0.8 58.25,-0.8 R33.1
D1_P: R29.1 R32.1 U3.61 | length 14.3
  Top Layer w0.15: U3.61 55.7,4.31 56.055,4.665 56.072,4.665 56.16,4.753 56.16,5.269 56.653,5.762 59.186,5.762 60.043,4.905 60.043,2.743 58.775,1.475 58.775,-0.712 58.863,-0.8 58.95,-0.8 R32.1 59.15,-0.95 59.5,-0.6 59.5,0.585 R29.1
D+: R32.2 U6.1 | length 3
  Top Layer w0.15: U6.1 58.725,-2.838 59.1,-2.463 R32.2
D-: R33.2 U6.2 | length 2.8
  Top Layer w0.15: U6.2 58.075,-1.875 R33.2
DIN: R42.2 TP8.1 U6.24 U9.4 | length 50.1
  Top Layer w0.2: R42.2 22.5,3.735 24.465,1.77 51.33,1.77 52.7,0.4 v1(53.65,0.4) ; v1@53.589,-7.911 54.579,-8.9 55.4,-8.9 56.125,-9.625 U6.24
  Top Layer w0.254: R42.2 22.513,6.312 22.513,7.788 U9.4@22.525,7.8
  Bottom Layer w0.2: v1(53.6,-7.9) 53.625,-7.875 53.625,0.375 v1(53.65,0.4)
GND: C6.2 C9.1 C12.2 C17.2 C20.1 C22.2 C23.1 C24.1 C25.1 C26.2 C27.2 C30.1 C31.1 C32.1 C33.1 C34.1 C37.1 C40.1 C41.1 C42.1 C43.1 C44.1 C45.1 C46.1 C47.1 C48.1 C49.1 C51.1 C53.1 C54.1 C55.1 C56.2 C59.2 C60.2 JP1.2 JP1.4 JP2.2 JP2.4 JP3.1 JP4.4 JP5.5 JP5.Shell Q2.2 R11.2 R19.2 R25.1 R27.1 R40.1 R45.1 SW1.3 SW1.4 SW2.3 SW2.4 SW3.3 SW3.4 TP3.1 TP4.1 TP6.1 TP9.1 U1.3 U1.6 U1.7 U1.15 U1.17 U2.4 U3.0 U3.1 U3.22 U3.23 U3.25 U3.63 U4.3 U4.13 U4.17 U5.1 U6.4 U6.11 U6.18 U6.22 U6.26 U7.2 U8.3 U9.3 | length 88.1
  Top Layer w0.254: JP4.4 8.13,7.6 11.2,7.6 11.8,8.2 R45.1 ; v1(13.35,18.3) C26.2 ; U4.3 13.35,23.5 v1(13.675,23.175) 14.65,22.2 U4.13 ; v1(14,7.8) U8.3 U8.3@15.175,7.8 ; v1(15.2,-15.338) 16.638,-15.338 16.65,-15.326 R19.2 ; v1(15.2,-1.3) C12.2 16.65,-1.35 R11.2 ; v1(15.4,11.5) C59.2 ; C27.2 v1(18.5,26) ; v1(17.55,-23.15) C56.2 ; v1(19.85,11.425) C60.2 ; v1(19.961,6.9) 19.968,6.907 19.968,7.793 U9.3@19.975,7.8 ; v1(20.248,15.2) R25.1 ; Q2.2 v1(21.05,24.9) ; C49.1@22.1,-20.2 22.05,-20.25 U1.7 22.05,-22.65 v1(22.3,-22.9) ; C17.2 v1(22.2,-14.1) ; v1(22.2,-2.6) C6.2 ; v1(22.5,-6) U2.4 ; U1.15 22.55,-23.15 v1(22.3,-22.9) ; U1.6 U1.17@22.55,-22.65 ; U1.3 U1.17@22.55,-22.65 ; C40.1 v1(25.65,-18.3) ; C37.1 v1(25.7,-27.8) ; C54.1 C55.1 v1(26.3,-23.7) ; C23.1@29.2,-7.95 v1(29.2,-7.1) ; C20.1 v1(31.7,-8.7) C9.1 ; v1(41,-24.8) C53.1 ; R40.1 v1(41.926,-19.7) ; v1(43.2,-22.79) 43.8,-22.19 43.8,-22.15 44.215,-22.15 U7.2 ; v1(44.7,25.5) C24.1 C24.1@45.54,25.6 ; C51.1 v1(46.8,-22.8) ; C43.1 v1(51.3,-1) 52.2,-1 ; C42.1 v1(50.3,-16.5) ; C25.1 C25.1@51.233,25.733 ; C46.1 51.58,-15.005 52.195,-15.005 v1(52.2,-15.01) v1@52.205,-15.005 ; U6.18 52.212,-11.562 52.212,-14.997 v1@52.205,-15.005 ; U6.11 52.225,-1.025 52.2,-1 ; C47.1 52.87,-15.005 v1@52.205,-15.005 ; C48.1 52.2,-1 ; v1@54.8,-9.8 v1(54.825,-9.825) U6.22 U6.22@54.863,-11.588 ; C45.1 v1(57.425,-15) ; v1(56.775,-3.023) U6.4 U6.4@56.8,-4.625 ; U6.26 v1(57.425,-15) ; C41.1 58.087,-17.187 58.087,-16.513 v1(58.1,-16.5) ; C44.1 v1(57.425,-15) ; C34.1 v1(61.4,-3.9) ; v1(68.8,21.9) 73.3,21.9 73.9,21.3 R27.1 ; v1(22.3,-22.9) U1.17@22.55,-22.65
  Top Layer w0.4: U3.25 v1(27.76,25.292) ; U3.23 v1(30.3,25.3) ; U3.22 v1(31.57,25.3) ; C25.1 v1(51.88,25.6) ; v1(58.24,2.7) U3.63 ; U3.1 v1(58.24,25.52)
  Bottom Layer w0.254: 25.255,-1.743 25.26,-1.738 ; 37.55,-5.238 38.16,-5.238
  other v1: 42.5,-16.66 40.8,-8.2 40.8,-4.2 19.8,4.6 40.426,11.869 41.926,11.869 43.426,11.869 40.426,13.369 41.926,13.369 43.426,13.369 40.426,14.869 41.926,14.869 43.426,14.869 68.8,19.8 68.8,23.99 8.8,25.05
  other v2: 1.45,19 1.45,27
  other v3: 1.45,21.8 1.45,24.2
LED: R22.1 U3.49 | length 119.2
  Top Layer w0.2: U3.49 40.46,2.74 41.08,2.12 51.88,2.12 v1(52.8,1.2) ; v1(49.35,-22.65) 70.602,-22.65 75.152,-27.2 79.3,-27.2 80.6,-25.9 80.6,6.9 78.825,8.675 R22.1
  Bottom Layer w0.2: v1(49.35,-22.65) 49.35,-15.649 53.475,-11.524 53.475,-8.697 53,-8.222 53,-7.651 53.225,-7.426 53.225,-0.485 52.8,-0.06 v1(52.8,1.2)
MMINL: C19.1 JP1.3 | length 15.1
  Top Layer w0.254: JP1.3 11.17,-0.77 12.7,-2.3 12.7,-9.2 13.7,-10.2 C19.1
MMINR: C8.1 JP1.1 | length 14.6
  Top Layer w0.254: JP1.1 9.89,4.31 11.2,3 11.2,0.8 15.19,-3.19 C8.1
MUTE: SW3.1 U6.5 | length 57.9
  Top Layer w0.2: U6.5 56.125,-6.215 56.585,-6.675 67.925,-6.675 78.1,3.5 79.2,3.5 80.1,2.6 80.1,-20.8 78.4,-22.5 78.4,-24.235 SW3.1
NetC1_1: C1.1 C2.1 C3.2 C4.1 C5.1 R6.2 R7.1 | length 7.8
  Top Layer w0.254: C3.2 27.381,-0.731 28.131,-0.731 28.55,-1.15 R6.2 R7.1 29.525,-1.175 30.375,-1.175 C1.1 31.2,-1.2 31.6,-0.8 C5.1 C4.1 C2.1
NetC1_2: C1.2 C2.2 C4.2 C5.2 R7.2 R8.1 U2.1 | length 12.5
  Top Layer w0.254: U2.1 28.7,-6 29.5,-5.2 R7.2 29.525,-2.025 30.375,-2.025 C1.2 30.5,-2.1 31.6,-2.1 C5.2 ; R8.1 C5.2 ; C2.2 C4.2 C5.2
NetC3_1: C3.1 R4.1 R6.1 | length 3
  Top Layer w0.254: C3.1 R6.1 R4.1
NetC6_1: C6.1 R5.1 | length 2.8
  Top Layer w0.254: C6.1 24.8,-2.665 24.985,-2.85 R5.1
NetC7_1: C7.1 C9.2 R8.2 | length 4.4
  Top Layer w0.254: R8.2 C9.2 C7.1
NetC8_2: C8.2 C10.1 R9.1 U2.3 | length 12.3
  Top Layer w0.254: C8.2 19.25,-6.2 19.65,-5.8 R9.1 ; C10.1 19.625,-2.725 19.625,-3.48 R9.1 ; U2.3 24.865,-4.065 24.305,-3.505 R9.1
NetC10_2: C10.2 C12.1 R9.2 R10.2 R11.1 | length 4.4
  Top Layer w0.254: R11.1 R10.2 R9.2 18.775,-3.48 18.775,-2.725 C10.2 18.8,-1.8 C12.1
NetC11_1: C11.1 C13.1 C14.2 C15.1 C16.1 R14.2 R15.1 | length 7.6
  Top Layer w0.254: C14.2 27.419,-15.881 28.502,-15.881 R14.2 28.625,-15.758 29.475,-15.758 C11.1 29.527,-15.76 30.373,-15.76 R15.1 30.498,-15.886 31.586,-15.886 C16.1 C15.1 C13.1
NetC11_2: C11.2 C13.2 C15.2 C16.2 R15.2 R16.1 U2.7 | length 13
  Top Layer w0.254: U2.7@26.2,-10.865 U2.7 26.135,-12 26.383,-12.248 27.848,-12.248 29.5,-13.9 C11.2 29.523,-14.91 30.377,-14.91 R15.2 30.45,-14.888 30.738,-14.6 C16.2 ; R16.1 C16.2 ; C13.2 C15.2 C16.2
NetC14_1: C14.1 R12.1 R14.1 | length 3.3
  Top Layer w0.254: R12.1 26.95,-13.65 27.2,-13.9 27.2,-14.5 C14.1 27.485,-14.785 28.502,-14.785 R14.1
NetC17_1: C17.1 R13.1 | length 1.8
  Top Layer w0.254: C17.1 24.835,-15.365 R13.1
NetC18_1: C18.1 C20.2 R16.2 | length 4.8
  Top Layer w0.254: R16.2 C20.2 32.5,-11.2 33.5,-10.2 C18.1
NetC19_2: C19.2 C21.1 R17.1 U2.5 | length 10.7
  Top Layer w0.254: C19.2 19.325,-10.2 19.55,-10.425 R17.1 ; C21.1 19.525,-13.675 19.525,-12.825 R17.1 ; U2.5 23.595,-12.33 23.1,-12.825 19.575,-12.825 R17.1
NetC21_2: C21.2 C22.1 R17.2 R18.2 R19.1 | length 4.9
  Top Layer w0.254: R19.1 R18.2 R17.2 18.675,-12.825 18.675,-13.675 C21.2 18.7,-14.877 19.223,-15.4 C22.1
NetC28_1: C28.1 U5.6 | length 1.5
  Top Layer w0.2: U5.6@72.7,17.125 C28.1
NetC34_2: C34.2 R46.1 U6.3 | length 7.4
  Top Layer w0.2: U6.3 57.425,-6.04 57.6,-6.215 59.885,-6.215 60.7,-5.4 C34.2 R46.1
NetC36_2: C36.2 R30.1 | length 6.3
  Top Layer w0.254: R30.1 27,-26.8 27.69,-26.11 C36.2 ; C36.2@27.74,-22.952 C36.2@27.8,-23.012
NetC37_2: C37.2 R28.1 R30.2 R31.1 | length 3.1
  Top Layer w0.2: R31.1 R28.1 C37.2 R30.2
NetC39_2: C39.2 R35.1 | length 3.5
  Top Layer w0.254: R35.1 27.642,-19.2 C39.2 27.74,-19.152 C39.2@27.56,-18.972
NetC40_2: C40.2 R34.1 R35.2 R36.1 | length 3
  Top Layer w0.2: R34.1 R36.1 R35.2 23.675,-19.175 23.675,-18.325 C40.2
NetC52_1: C52.1 U1.4 | length 1.8
  Top Layer w0.2: U1.4 25.45,-22.15 C52.1@25.5,-22.2
NetC52_2: C52.2 U1.2 | length 1.8
  Top Layer w0.2: U1.2 25.45,-23.15 C52.2@25.5,-23.1
NetC56_1: C56.1 U1.11 | length 1.8
  Top Layer w0.2: C56.1 U1.11
NetC57_2: C57.2 R43.1 | length 1
  Top Layer w0.254: R43.1 C57.2
NetC58_1: C58.1 R41.2 TP7.1 U8.4 | length 4.4
  Top Layer w0.254: TP7.1 R41.2 C58.1 18.01,6.9 17.766,7.144 17.766,7.759 U8.4@17.725,7.8
NetC58_2: C58.2 R44.1 | length 1
  Top Layer w0.254: C58.2 R44.1
NetJP5_2: JP5.2 R20.1 | length 5.1
  Top Layer w0.2: v1(8.4,22.75) R20.1
  Bottom Layer w0.2: JP5.2 7.273,22.35 7.673,22.75 v1(8.4,22.75)
NetJP5_3: JP5.3 R21.1 | length 5.1
  Top Layer w0.2: v1(8.4,23.6) R21.1
  Bottom Layer w0.2: JP5.3@4.175,23 7.015,23 7.615,23.6 v1(8.4,23.6)
NetLED1_K: LED1.K R22.2 | length 3.2
  Top Layer w0.254: R22.2 LED1.K
NetQ1_1: Q1.1 R24.2 | length 1.3
  Top Layer w0.15: R24.2 22.95,19.335 Q1.1
NetQ1_3: Q1.3 R23.1 R25.2 | length 2.4
  Top Layer w0.254: R25.2 R23.1 22.017,16.017 22.017,17.483 Q1.3
NetQ2_3: Q2.3 R24.1 | length 1.4
  Top Layer w0.15: R24.1@22,20.65 R24.1
  Top Layer w0.254: R24.1@22,20.65 Q2.3
NetR1_1: R1.1 SW1.2 | length 24.5
  Top Layer w0.254: R1.1 76.025,-8.5 79.7,-4.825 79.7,0.935 SW1.2
NetR2_1: R2.1 SW2.2 | length 15.2
  Top Layer w0.2: R2.1 75.645,-10.5 SW2.2
NetR3_1: R3.1 SW3.2 | length 24.9
  Top Layer w0.2: R3.1 74.7,-12.5 76.4,-10.8 78.8,-10.8 79.6,-11.6 79.6,-14.933 78.39,-16.143 SW3.2
NetR4_2: R4.2 R5.2 U2.2 | length 3.9
  Top Layer w0.254: R5.2@26.095,-3.738 R4.2 ; U2.2 R5.2
NetR12_2: R12.2 R13.2 U2.6 | length 3.2
  Top Layer w0.254: U2.6 24.85,-10.815 24.85,-12.735 24.865,-12.75 R12.2
NetR20_2: R20.2 U4.7 | length 1.7
  Top Layer w0.2: R20.2 10.5,22.75 10.6,22.85 U4.7
NetR21_2: R21.2 U4.6 | length 1.7
  Top Layer w0.2: R21.2 10.5,23.6 10.6,23.5 U4.6
NetR41_1: R41.1 R43.2 U8.2 | length 4.6
  Top Layer w0.254: R43.2 15.175,8.75 15.7,8.75 16,8.45 R41.1
NetR42_1: R42.1 R44.2 U9.2 | length 5.3
  Top Layer w0.254: R44.2 18.81,8.6 18.96,8.75 19.975,8.75 20.85,8.75 21.6,8 R42.1
NetR47_2: R47.2 U3.19 | length 28.8
  Top Layer w0.15: v1@20.5,25.85 v1(20.5,25.99)
  Top Layer w0.2: R47.2 16.95,17.45 19.7,20.2 19.7,25.19 v1(20.5,25.99)
  Top Layer w0.254: U3.19 v1(35.38,25.292)
  Bottom Layer w0.254: v1(20.5,25.99) 32.42,25.99 33.118,25.292 v1(35.38,25.292)
RXD: U3.40 U4.15 | length 38.2
  Top Layer w0.15: U4.15 16.525,23.5 16.85,23.175 16.85,19.8 13.05,16 13.05,15.026 14.576,13.5 21.776,13.5 24.2,11.076 24.2,3.3 25.2,2.3 28.45,2.3 29.03,2.88 U3.40
SPDIF-IN: C57.1 JP4.3 R45.2 | length 6.1
  Top Layer w0.254: JP4.3 9.48,10.23 10.7,11.45 R45.2 11.826,11.476 C57.1
SSPNDN: R1.2 R2.2 R3.2 U1.16 U6.28 | length 64.5
  Top Layer w0.2: v1(23.05,-25.6) U1.16 ; v1(29.8,-26.23) 31.47,-27.9 50.5,-27.9 50.8,-27.6 50.8,-27 49.35,-25.55 49.35,-23.428 48.8,-22.878 48.8,-22.422 49.122,-22.1 57.89,-22.1 59.1,-20.89 59.1,-13.65 58.725,-13.275 U6.28 62.6,-11.55 62.65,-11.6 ; R3.2 62.65,-11.6 ; R1.2 R2.2 62.65,-11.6
  Bottom Layer w0.2: v1(23.05,-25.6) 23.68,-26.23 v1(29.8,-26.23)
SW: C28.2 L1.1 U5.2 | length 1.7
  Top Layer w0.2: v1(71.2,18.6) C28.2
  Top Layer w0.4: v1(69.1,16.1) U5.2
  other v1: 62.65,14.2 64.1,14.2 65.4,14.2
TXD: U3.39 U4.2 | length 45.2
  Top Layer w0.15: U4.2 v1(14,25.99) ; v1(19.5,26) 17.25,23.75 17.25,19.65 13.35,15.75 13.35,15.15 14.7,13.8 21.9,13.8 24.5,11.2 24.5,3.5 25.4,2.6 27.493,2.6 27.76,2.868 U3.39@27.76,3.66
  Bottom Layer w0.2: v1(14,25.99) 14.058,26.049 17.7,26.049 18.251,26.6 18.9,26.6 v1(19.5,26)
VBUS: C26.1 C30.2 C59.1 C60.1 JP4.1 JP5.1 LED1.A R38.2 R46.2 U4.10 U5.3 U8.5 U9.5 | length 60.4
  Top Layer w0.254: 7,19.8 C26.1 U4.10 ; JP4.1 10.49,15.31 13.1,12.7 16.8,12.7 ; 10.4,27.5 10.451,27.449 ; U8.5@17.725,9.7 17.725,11.301 17.526,11.5 C59.1 16.85,12.65 16.8,12.7 ; U9.5@22.525,9.7 22.525,11.088 22.188,11.425 C60.1 21.42,12.3 21.02,12.7 16.8,12.7 ; R38.2 46.25,-25.55 48,-27.3 v1(50,-27.3) ; R46.2 64.6,-5.4 75.5,5.5 v1(78.5,5.5) ; LED1.A@78.725,25.35 78.775,25.3 LED1.A 78.825,27.9
  Bottom Layer w0.4: JP5.1 v1(5.7,21.7) v1(6.922,21.7)
  other v1: 77.3,12.73 77.3,13.8 8.5,27.5 18.5,27.5 28.5,27.5 38.5,27.5 48.5,27.5 58.5,27.5 68.5,27.5 77.8,27.5 79.8,27.5
VCC: C23.2 C48.2 C50.2 C53.2 C54.2 C55.2 R10.1 R18.1 R39.2 TP5.1 U1.1 U1.9 U1.13 U2.8 U6.10 U7.5 | length 121.7
  Top Layer w0.2: v1(52.875,-8.975) U6.10
  Top Layer w0.254: R18.1 16.65,-8.153 ; R10.1 16.65,-8.153 ; v1(20.5,-20.8) 20.5,-20.894 20.852,-21.246 U1.9 ; v1(21.148,-25.6) 21.15,-25.6 21.55,-25.2 U1.13 ; U1.1 23.748,-24.355 24.035,-24.643 v1(24.035,-25.565) 24.865,-25.565 C54.2 24.935,-25.565 24.935,-24.913 C55.2 ; U2.8 28.9,-10.8 29.2,-10.5 ; C53.2 41.64,-23.2 U7.5@42.05,-22.79 ; v1(49.35,-14.8) 48.16,-14.8 TP5.1 43.2,-19.76 43.2,-21.89 42.3,-22.79 U7.5 U7.5@42.05,-22.79 ; U6.10 52.887,-4.638 52.887,-1.813 C48.2 ; 16.65,-8.153 16.697,-8.2 25.4,-8.2 26.05,-8.85 29.2,-8.85 29.2,-10.5 ; 29.2,-10.5 32.2,-10.5 32.9,-9.8 32.9,-8.8 33.547,-8.153 35.752,-8.153 36.1,-8.5 36.1,-16.4 35.5,-17 29.5,-17 29.1,-17.4 v1(29.1,-25.6) 38.6,-25.6 40.1,-24.1 C50.2 40.125,-22.375 41.635,-22.375 U7.5@42.05,-22.79
  Bottom Layer w0.2: v1(49.35,-14.8) 52.875,-11.275 v1(52.875,-8.975)
  Bottom Layer w0.254: v1(20.5,-20.8) 20.5,-24.952 v1(21.148,-25.6) 22,-25.6 22.627,-24.973 23.443,-24.973 v1(24.035,-25.565) ; v1@24.035,-25.6 v1(29.1,-25.6)
VCCIO: C27.1 U4.1 U4.8 U4.9 | length 16.7
  Top Layer w0.2: U4.8 11.631,22.181 10.981,22.181 10.6,21.8 v1(10.6,21.15) U4.9 U4.9@12.696,21.146 ; U4.1 14.65,25.85 14.8,26 C27.1 16.512,25.988 16.512,24.912 v1(16.525,24.9)
  Bottom Layer w0.2: v1(10.6,21.15) 15.45,21.15 16.525,22.225 v1(16.525,24.9)
VCCP1I: C46.2 U6.17 | length 2.6
  Top Layer w0.2: C46.2 U6.17
VCCP2I: C47.2 U6.19 | length 2.6
  Top Layer w0.2: C47.2 U6.19
VCCXI: C45.2 U6.23 | length 2.6
  Top Layer w0.2: C45.2 U6.23
VCOM: C43.2 U6.14 | length 2.3
  Top Layer w0.254: U6.14 C43.2
VDD_FLASH: R23.2 U3.32 | length 4.6
  Top Layer w0.254: R23.2 22.9,14.9 23.8,14 U3.32
VDDI: C44.2 R29.2 U6.8 U6.9 U6.27 | length 22.3
  Top Layer w0.2: U6.9 53.525,-6.025 54.175,-6.675 ; R29.2 55.76,0.635 54.175,-0.95 U6.8 54.175,-6.675 ; C44.2 U6.27 58.075,-9.075 57,-8 55.5,-8 54.175,-6.675
VFB: C29.1 R26.1 R27.2 U5.4 | length 3
  Top Layer w0.2: U5.4@72.7,15.225 72.725,15.25 R27.2 R26.1 74.825,15.275 75.675,15.275 C29.1
VOL_DOWN: SW2.1 U6.7 | length 36.1
  Top Layer w0.2: U6.7 54.825,-6.725 55.7,-7.6 63.179,-7.6 63.5,-7.921 63.5,-14.2 65.4,-16.1 76.7,-16.1 78.39,-14.41 SW2.1
VOL_UP: SW1.1 U6.6 | length 27.8
  Top Layer w0.2: U6.6 55.475,-6.375 56.2,-7.1 68.4,-7.1 74.3,-1.2 77.345,-1.2 SW1.1
VOUTL: C36.1 U6.16 | length 25.8
  Top Layer w0.2: C36.1 32.745,-22.952 42.197,-13.5 50.125,-13.5 50.925,-12.7 U6.16
VOUTL: C35.2 JP2.3 JP3.2 R28.2 U1.12 | length 39.7
  Top Layer w0.2: C35.2 20.2,-26.815 20.2,-27.5 20.5,-27.8 R28.2
  Top Layer w0.254: JP2.3 6.23,-11.77 5.4,-12.6 JP3.2 7.75,-27.05 10.5,-24.3 20.185,-24.3 ; C35.2 20.185,-24.3 ; U1.12 20.359,-23.65 20.185,-23.824 20.185,-24.3
VOUTR: C39.1 U6.15 | length 23.6
  Top Layer w0.2: C39.1 35.848,-19.152 42,-13 50.025,-13 50.275,-12.75 U6.15
VOUTR: C38.2 JP2.1 JP3.3 R34.2 U1.10 | length 29.7
  Top Layer w0.2: JP2.1 9.49,-6.69 9.9,-7.1 JP3.3 13.2,-17.45 14.05,-18.3 19.7,-18.3 ; U1.10 20,-22.65 19.7,-22.35 C38.2 19.7,-18.3 ; R34.2 19.7,-18.3
VSS: C49.2 U1.5 | length 1.3
  Top Layer w0.254: C49.2@23,-20.2 23.05,-20.25 U1.5
VUSB: C51.2 R38.1 U7.1 U7.3 | length 4.7
  Top Layer w0.254: U7.1 44.23,-22.795 45.395,-22.795 C51.2 ; U7.3 45.34,-21.49 45.4,-21.55 C51.2 ; R38.1 45.375,-23.875 45.375,-22.825 C51.2
WLEDn: JP4.2 R47.1 | length 8.8
  Top Layer w0.2: v1(14.5,15.27) R47.1
  Bottom Layer w0.2: JP4.2@8.04,13.27 12.5,13.27 v1(14.5,15.27)
XTI: C41.2 R37.1 U6.21 Y1.1 | length 9.9
  Top Layer w0.2: U6.21 54.175,-13.225 54.55,-13.6 R37.1 54.55,-17.65 54.9,-18 Y1.1 C41.2
XTO: C42.2 R37.2 U6.20 Y1.2 | length 10.2
  Top Layer w0.2: C42.2 Y1.2 53.6,-18 54,-17.6 54,-16.1 53.65,-15.75 R37.2 53.7,-14.96 53.7,-13.711 53.525,-13.536 U6.20
pads on no net: FID1.0 FID2.0 FID3.0 JP3.4 JP3.5 JP5.4 JP5.MH1 JP5.MH2 U3.2 U3.3 U3.4 U3.6 U3.7 U3.10 U3.11 U3.12 U3.13 U3.14 U3.15 U3.16 U3.17 U3.18 U3.20 U3.21 U3.24 U3.26 U3.27 U3.28 U3.29 U3.30 U3.31 U3.33 U3.34 U3.35 U3.36 U3.37 U3.38 U3.41 U3.42 U3.43 U3.44 U3.45 U3.46 U3.47 U3.48 U3.50 U3.51 U3.52 U3.53 U3.54 U3.55 U3.56 U3.57 U3.58 U3.59 U3.60 U4.4 U4.5 U4.11 U4.12 U4.14 U4.16 U5.5 U6.25 U8.1 U9.1

## Polygon pours and split planes (outlines as drawn)
VBUS on Top Layer "VBUS_L01_P026" (solid, pour order 26): 4,28.3 81,28.3 81,26.4 7.5,26.4 7.5,14.5 4,14.5
GND on Top Layer "GND_L01_P032" (solid, pour order 32): 66.9,24.9 66.9,16.7 70.8,16.7 70.8,24.9
VBUS on Top Layer "Top Layer-VBUS" (solid, pour order 30): 70.6,15.5 66.9,15.5 66.9,12.2 78.2,12.2 78.2,14.3 70.6,14.3
SW on Top Layer "Top Layer-SW" (solid, pour order 7): 61.6,12.2 61.6,15 66.6,15 66.6,12.2
3V3 on Top Layer "3V3_L01_P009" (solid, pour order 9): 65.2,16.6 61.6,16.6 61.6,25.52 65.2,25.52
GND on Bottom Layer "Bottom Layer-GND" (solid, remove dead copper, pour order 28): 0,21 4,21 4,9 6.5,6.5 12.8,6.5 18,1.3 51,1.3 53.2,-0.9 53.2,-11.785 49.3,-15.5 49.3,-28.3 76.2,-28.3 76.2,28.3 0,28.3
GND on Bottom Layer "GND_L02_P013" (solid, remove dead copper, pour order 13): 0,21 3.5,21 3.5,8.655 6.176,6.1 12.7,6.1 17.8,1 50.9,1 53,-1.1 53,-11.482 48.9,-15.5 48.9,-28.3 0,-28.3
VBUS on Bottom Layer "VBUS_L02_P017" (solid, pour order 17): 7,28.3 81,28.3 81,26.7 7,26.7
SW on Bottom Layer "SW_L02_P000" (solid, pour order 0): 61.9,13.4 67.36,13.4 72.2,18.24 72.2,19.2 70.629,19.2 68,16.571 61.9,16.571
VBUS on Bottom Layer "Bottom Layer-VBUS 1" (solid, pour order 22): 76.3,28.3 76.3,-28.3 81,-28.3 81,28.3
VBUS on Bottom Layer "VBUS_L02_P024" (solid, pour order 24): 49.3,-28.3 81,-28.3 81,-26.2 72.9,-26.2 60.627,-26.2 49.3,-26.2
3V3 on Bottom Layer "Bottom Layer-3V3" (solid, pour order 15): 47.5,25.5 47.5,19.1 63.3,19.1 63.3,25.5

## Silkscreen, mask and mechanical layers (free items; w line width, h text height)
Mechanical 1:
  the board outline again, w0.2

## Text inside footprints (layer, text, board x,y; h text height)
JP5: Mechanical 2 "PCB Edge" at -0.65,21.8 h0.41 r270